# Altium PCB PCB3.PcbDoc
Units mm, origin at the board's own origin, x right, y up, seen from the top; angles counter-clockwise.
Board outline 200 x 100 mm, 2 copper layers (Top Layer, Bottom Layer); 133 components, 113 nets, 472 pads, 55 vias.
Unrouted connection lines stored in the file: 51.
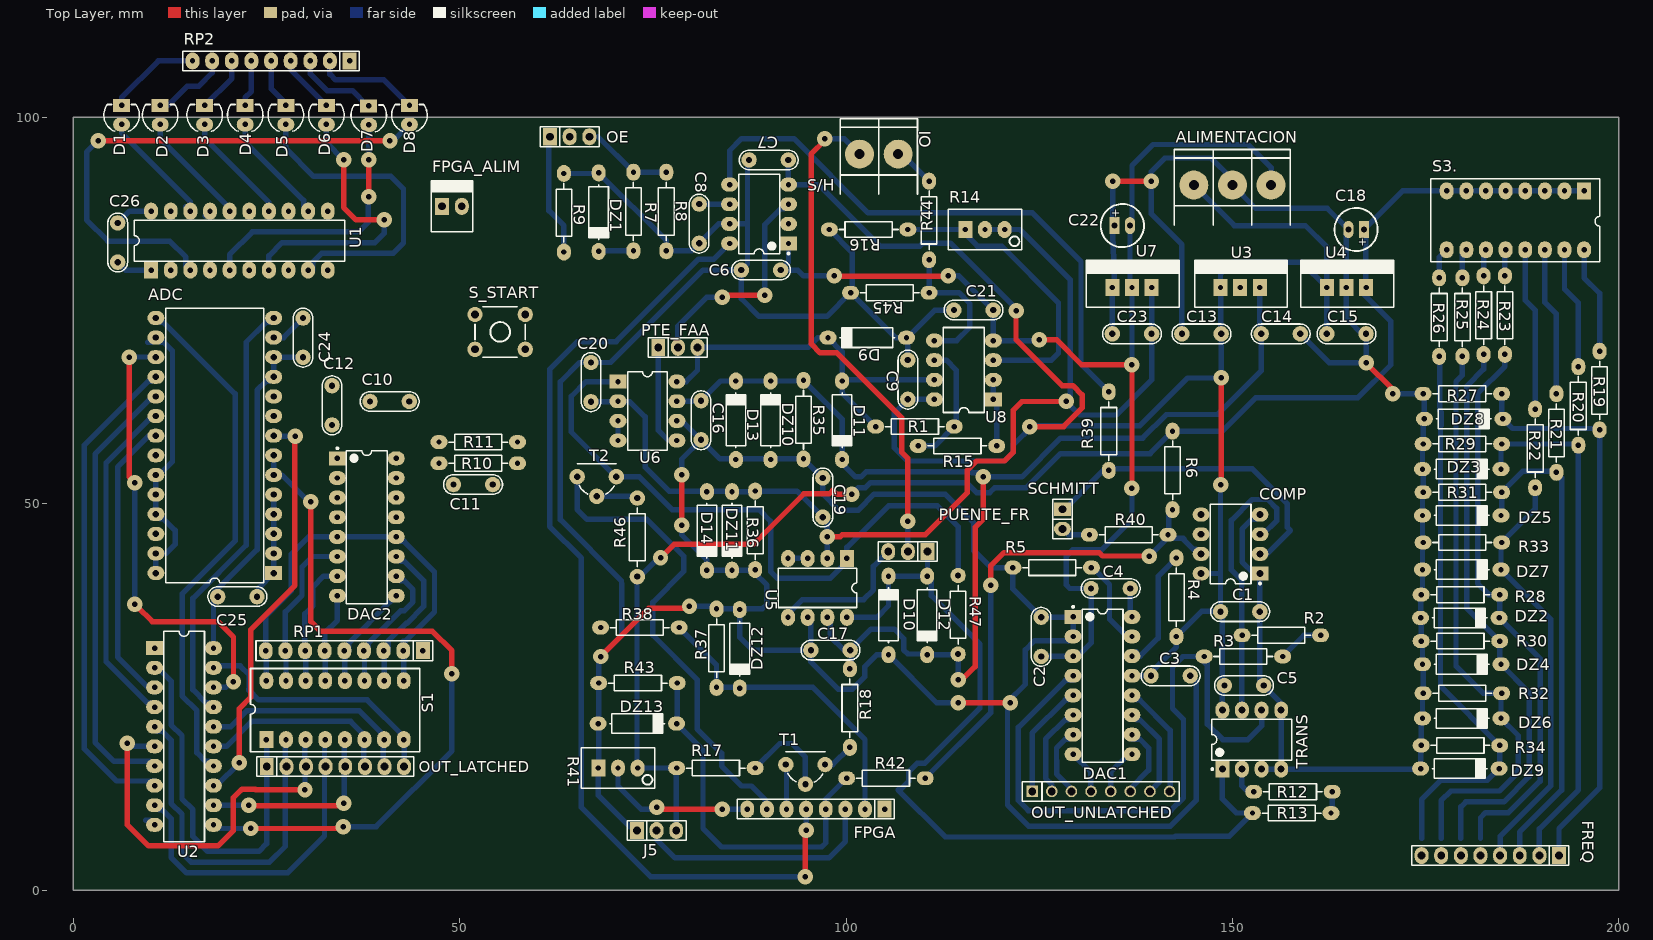
[diagram p0: Top Layer view]
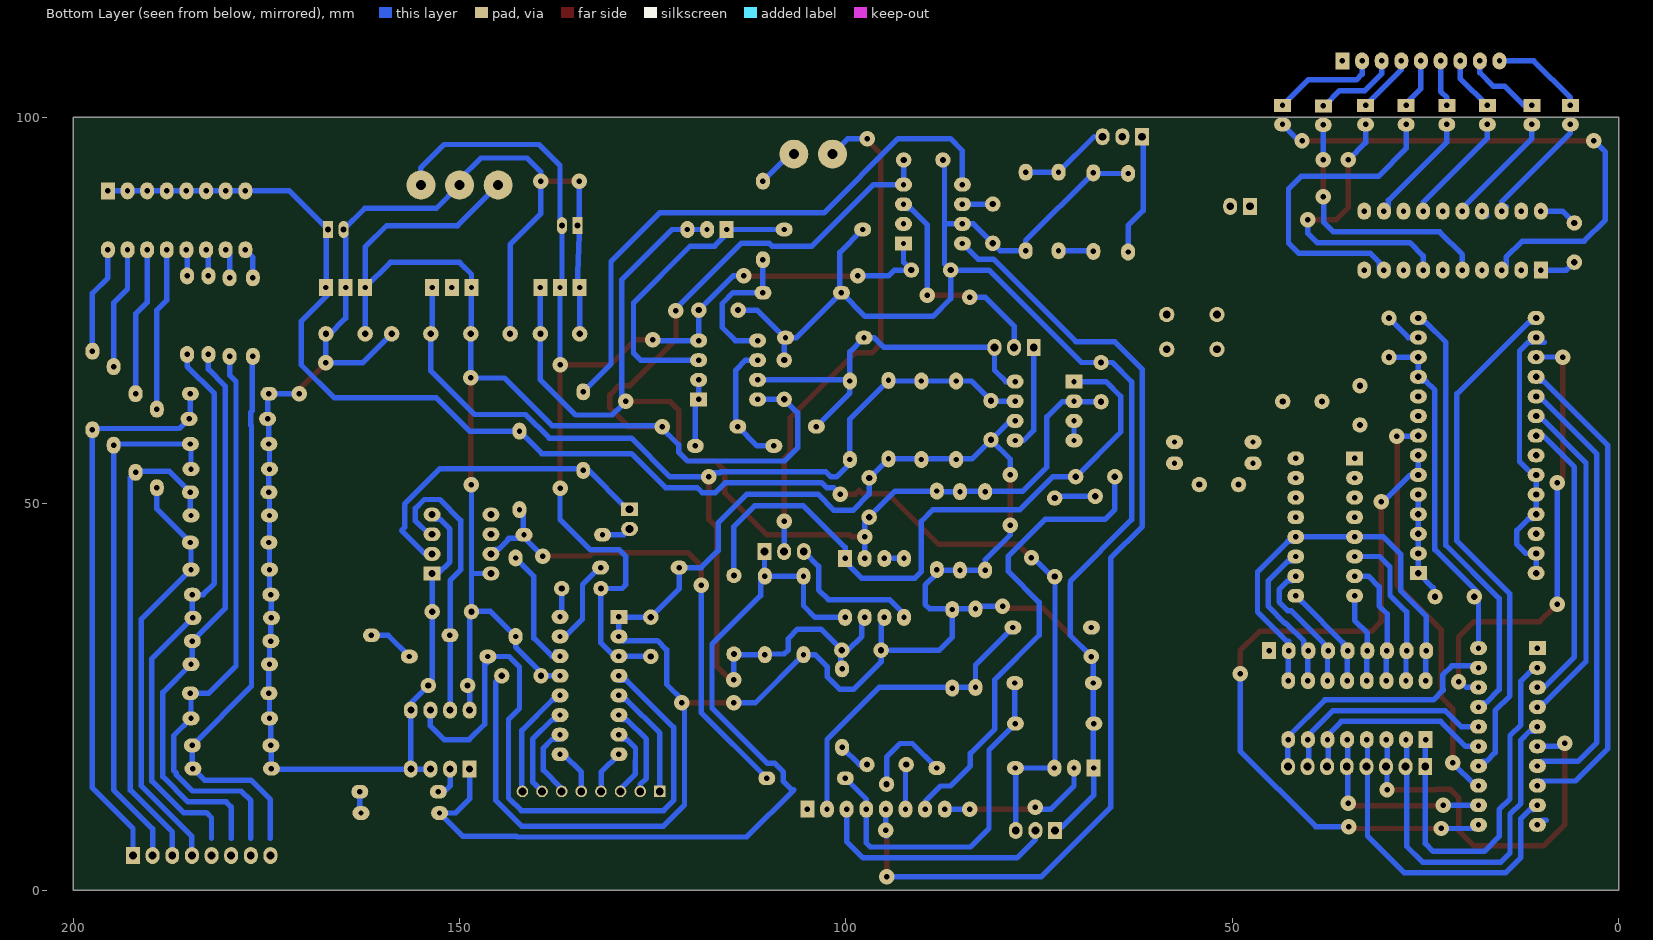
[diagram p1: Bottom Layer view, seen from below]

## Layer stack, top to bottom
Top Solder: solder mask 0.0102, Solder Resist, Dk 3.5
Top Layer: signal copper 0.0356
Dielectric 1: dielectric 0.32, FR-4, Dk 4.8
Bottom Layer: signal copper 0.0356
Bottom Solder: solder mask 0.0102, Solder Resist, Dk 3.5

## Board outline
0,0 0,100 200,100 200,0 0,0

## Design rules (kind name [scope] priority, off if disabled: settings)
Clearance [All] p1: gap=0.7
PolygonConnect [All] p1: connectstyle=Relief reliefconductorwidth=0.254 reliefentries=4 polygonreliefangle="90 Angle" airgapwidth=0.254
RoutingVias [All] p1: holewidth=0.7 width=2 viastyle="Through Hole" minholewidth=0.7 minwidth=2 maxholewidth=0.7 maxwidth=2
SolderMaskExpansion [All] p1: expansion=0.102
Width [All] p1: maxlimit=0.7 minlimit=0.7 preferedwidth=0.7
30 further rules are at their usual default settings.

## Components (designator, comment, footprint, x,y, rotation, side; value= is the part's Value field where it differs from the comment)
ADC "ADC0808CCN" DIP28 25.95,41.04 r180 top
ALIMENTACION "BORNERA 3" BORNERA3 150,91.25 r270 top
C1 "100n" CAP200 151,36.05 r0 top
C2 "100n" CAP200 125.25,32.8 r270 top
C3 "100n" CAP200 142,27.75 r180 top
C4 "10n" CAP200 134.25,39.05 r0 top
C5 "100n" CAP200 151.5,26.5 r0 top
C6 "100n" CAP200 89,80.25 r180 top
C7 "100n" CAP200 90,94.5 r180 top
C8 "10n" CAP200 81,86.25 r270 top
C9 "CAP" CAP200 108,66.07 r90 top
C10 "10n" CAP200 40.96,63.25 r180 top
C11 "100n" CAP200 51.75,52.5 r180 top
C12 "100n" CAP200 33.5,62.75 r270 top
C13 "330n" CAP200 146,72 r180 top
C14 "100n" CAP200 156.25,72 r0 top
C15 "100n" CAP200 164.75,72 r0 top
C16 "100n" CAP200 81.25,60.82 r270 top
C17 "100n" CAP200 98,31.07 r0 top
C18 "10u" CAP100RP 166,85.5 r180 top
C19 "100n" CAP200 97,50.82 r90 top
C20 "100n" CAP200 67,65.75 r90 top
C21 "CAP" CAP200 116.5,75.07 r180 top
C22 "2.2u" CAP100RP 135.75,86 r0 top
C23 "1u" CAP200 137,72 r180 top
C24 "100n" CAP200 29.75,71.5 r90 top
C25 "CAP" CAP200 21.25,38 r180 top
C26 "CAP" CAP200 5.77,83.81 r270 top
COMP "LM311N" N08E#1 149.75,44.8 r180 top
D1 "LED" LED3 6.27,100.31 r90 top
D2 "LED" LED3 11.27,100.31 r90 top
D3 "LED" LED3 17.02,100.31 r90 top
D4 "LED" LED3 22.27,100.31 r90 top
D5 "LED" LED3 27.52,100.31 r90 top
D6 "LED" LED3 32.77,100.31 r90 top
D7 "LED" LED3 38.25,100.25 r90 top
D8 "LED" LED3 43.52,100.31 r90 top
D9 "DIODO" DO41 102.75,71.5 r180 top
D10 "DIODO" DO41 105.5,35.57 r90 top
D11 "DIODO" DO41 99.5,60.82 r270 top
D12 "DIODO" DO41 110.5,35.57 r270 top
D13 "DIODO" DO41 85.75,60.82 r90 top
D14 "DIODO" DO41 82,46.5 r270 top
DAC1 "DAC0800LCN" N16E 133.19,26.49 r0 top
DAC2 "DAC0800LCN" N16E 38,47 r0 top
DZ1 "3.3V" DO41 68,87.75 r270 top
DZ2 "3.6V" DO41 179.42,35.25 r0 top
DZ3 "3.6V" DO41 179.67,54.5 r0 top
DZ4 "3.6V" DO41 179.67,29.25 r0 top
DZ5 "3.6V" DO41 179.67,48.5 r0 top
DZ6 "3.6V" DO41 179.67,22.25 r0 top
DZ7 "3.6V" DO41 179.67,41.5 r0 top
DZ8 "3.6V" DO41 179.92,61 r0 top
DZ9 "3.6V" DO41 179.42,15.75 r0 top
DZ10 "5.6V" DO41 90.25,60.82 r90 top
DZ11 "5.6V" DO41 85.25,46.5 r270 top
DZ12 "3.6V" DO41 86.25,31.25 r270 top
DZ13 "3.6V" DO41 73,21.57 r0 top
FPGA "CON8" SIP8#1 105,10.5 r180 top
FPGA_ALIM "MOLEX2" MOLEX2 47.75,88.5 r0 top
FREQ "CON8" SIP8#2 192.25,4.5 r180 top
IO "BORNERA 2" BORNERA2 104.25,95.25 r270 top
J5 "SAR/MOD" JUMPER3 75.5,7.75 r0 top
OE "JUMPER" JUMPER3 64.25,97.5 r0 top
OUT_LATCHED "CON8" SIP8#2 25.05,16 r0 top
OUT_UNLATCHED "CON8" SIP8#3 124.09,12.8 r0 top
PTE_FAA "JUMPER" JUMPER3 78.25,70.25 r0 top (schematic designator PUENTE_FAA)
PUENTE_FR "JUMPER" JUMPER3 108,43.82 r180 top
R1 "4k7" RES400#1 114,60 r180 top
R2 "1K5" RES400#1 151.25,33 r0 top
R3 "1K" RES400#1 156.5,30.25 r180 top
R4 "5K" RES400#1 142.75,43 r270 top
R5 "5K" RES400#1 131.75,41.75 r180 top
R6 "1K" RES400#1 142.25,49.25 r90 top
R7 "560" RES400#1 72.5,82.75 r90 top
R8 "1K" RES400#1 76.75,82.75 r90 top
R9 "1K" RES400#1 63.5,92.75 r270 top
R10 "5K" RES400#1 57.5,55.25 r180 top
R11 "5K" RES400#1 57.5,58 r180 top
R12 "1K" RES400#1 152.75,12.75 r0 top
R13 "1k5" RES400#1 162.75,10 r180 top
R14 "10k" "PRESET V" 117.98,85.5 r0 top
R15 "4k7" RES400#1 119.5,57.5 r180 top
R16 "4k7" RES400#1 108,85.5 r180 top
R17 "2k2" RES400#1 88.25,15.82 r180 top
R18 "6k8" RES400#1 100.5,18.5 r90 top
R19 "10k" RES400#1 197.5,69.75 r270 top
R20 "10k" RES400#1 194.75,67.75 r270 top
R21 "10k" RES400#1 191.92,64.25 r270 top
R22 "10k" RES400#1 189.17,62.25 r270 top
R23 "10k" RES400#1 185.25,79.5 r270 top
R24 "10k" RES400#1 182.5,79.5 r270 top
R25 "10k" RES400#1 179.75,79.25 r270 top
R26 "10k" RES400#1 176.75,79.25 r270 top
R27 "22k" RES400#1 174.67,64.25 r0 top
R28 "22k" RES400#1 174.42,38.25 r0 top
R29 "22k" RES400#1 174.67,57.75 r0 top
R30 "22k" RES400#1 174.42,32.25 r0 top
R31 "22k" RES400#1 174.67,51.5 r0 top
R32 "22k" RES400#1 174.67,25.5 r0 top
R33 "22k" RES400#1 174.67,45 r0 top
R34 "22k" RES400#1 174.42,18.75 r0 top
R35 "10k" RES400#1 94.5,55.82 r90 top
R36 "10k" RES400#1 88.25,41.5 r90 top
R37 "20k" RES400#1 83.25,26.25 r90 top
R38 "10k" RES400#1 68.25,34 r0 top
R39 "TBD" RES400#1 134,64.5 r270 top
R40 "TBD" RES400#1 131.5,46 r0 top
R41 "PRESET" "PRESET V" 70.5,15.82 r0 top
R42 "10K" RES400#1 110.25,14.5 r180 top
R43 "20K" RES400#1 68,26.82 r0 top
R44 "4k7" RES400#1 110.75,91.75 r270 top
R45 "4k7" RES400#1 110.75,77.32 r180 top
R46 "2k2" RES400#2 73,50.75 r270 top
R47 "6k8" RES400#2 114.5,30.57 r90 top
RP1 "R-PACK 8+1" RESNET8+1 45.25,31 r180 top
RP2 "R-PACK 8+1" RESNET8+1 35.77,107.31 r180 top
S1 "SW-DIP8" DIP-16-KEY 25,19.5 r0 top
S3. "SW-DIP8" DIP-16-KEY 195.5,90.5 r180 top
S/H "LF398N" N08E#2 88.75,87.5 r180 top
S_START "TACT SWITCH" TACTSWITCH 55.25,72.25 r90 top
SCHMITT "JUMPER" JUMPER2 128,48.03 r270 top
T1 "TRANSISTOR NPN" TO92 94.75,15 r0 top
T2 "TRANSISTOR NPN" TO92 67.75,52.25 r0 top
TRANS "LM358N" N08E#1 152.5,19.5 r90 top (schematic designator TRANSIMPEDANCIA)
U1 "SN74LS244N" 738-03 21.52,84.06 r0 top
U2 "MC74HC374N" 738-03 14.35,19.9 r270 top
U3 "7805" "TO-220 V" 151,78 r0 top
U4 "MC33269" "TO-220 V" 164.75,78 r0 top
U5 "MAX297CPA" DIP8 100.12,42.94 r270 top
U6 "MAX297CPA" DIP8 70.5,65.82 r0 top
U7 "7905" "TO-220 V" 137,78 r0 top
U8 "TL082ACJG" 693-02 115.25,67.32 r90 top

## Footprints (in the part's own frame and the unit in brackets; to place one, negate y for a bottom-side part, rotate by r counter-clockwise, add the part's x,y. Pads: shape width x height; smd on the part's side, far side on the other; paste and mask are expansions set on the pad)
693-02 [mm] "DIP; 8 Leads; Row Spacing 7.62 mm; Pitch 2.54 mm"
  rect 1.8x2.2 hole 0.7: 1(-3.81,-3.81)
  oval 1.8x2.2 hole 0.7: 2(-1.27,-3.81) 3(1.27,-3.81) 4(3.81,-3.81) 5(3.81,3.81) 6(1.27,3.81) 7(-1.27,3.81) 8(-3.81,3.81)
  silkscreen extent -5.5,-2.65 5.5,2.65
738-03 [mm] "DIP; 20 Leads; Row Spacing 7.62 mm; Pitch 2.54 mm"
  rect 1.8x2.2 hole 0.7: 1(-11.43,-3.81)
  oval 1.8x2.2 hole 0.7: 2(-8.89,-3.81) 3(-6.35,-3.81) 4(-3.81,-3.81) 5(-1.27,-3.81) 6(1.27,-3.81) 7(3.81,-3.81) 8(6.35,-3.81) 9(8.89,-3.81) 10(11.43,-3.81) 11(11.43,3.81) 12(8.89,3.81) 13(6.35,3.81) 14(3.81,3.81) 15(1.27,3.81) 16(-1.27,3.81) 17(-3.81,3.81) 18(-6.35,3.81) 19(-8.89,3.81) 20(-11.43,3.81)
  silkscreen extent -13.6,-2.65 13.6,2.65
BORNERA2 [mm] "Bornera con Tornillos 5mm separación"
  round 3.75 hole 1.3: 1(0,2.5) 2(0,-2.5)
  silkscreen extent -4.6,-5 5.2,5, body extent -3.76,-4.89 3.94,5.61, height 10
BORNERA3 [mm] "Bornera con Tornillos 5mm separación"
  round 3.75 hole 1.3: 1(0,5) 2(0,0) 3(0,-5)
  silkscreen extent -4.6,-7.5 5.2,7.5, body extent -3.76,-7.39 3.94,8.11, height 10.05
CAP100RP [mm] "Body diameter 5mm"
  rect 1.3x2.2 hole 0.762: 1(-1,0)
  oval 1.3x2.2 hole 0.762: 2(1,0)
  silkscreen extent -2.79,-2.79 2.79,2.79, body extent -2.53,-2.51 2.53,2.54, height 11.53
CAP200 [mm]
  round 2 hole 0.813: 1(-2.54,0) 2(2.54,0)
  silkscreen extent -3.81,-1.27 3.81,1.27, body extent -2.79,-1.17 2.79,1.12, height 6.24
DIP8 [mm]
  rect 2.2x1.8 hole 0.7: 1(0,0)
  oval 2.2x1.8 hole 0.7: 2(0,-2.54) 3(0,-5.08) 4(0,-7.62) 5(7.62,-7.62) 6(7.62,-5.08) 7(7.62,-2.54) 8(7.62,0)
  silkscreen extent 1.27,-8.89 6.35,1.27, body extent -0.06,-9.21 7.7,1.59, height 4.5
DIP28 [mm]
  rect 2.2x1.8 hole 0.813: 1(0,0)
  oval 2.2x1.8 hole 0.813: 2(0,-2.54) 3(0,-5.08) 4(0,-7.62) 5(0,-10.16) 6(0,-12.7) 7(0,-15.24) 8(0,-17.78) 9(0,-20.32) 10(0,-22.86) 11(0,-25.4) 12(0,-27.94) 13(0,-30.48) 14(0,-33.02) 15(15.24,-33.02) 16(15.24,-30.48) 17(15.24,-27.94) 18(15.24,-25.4) 19(15.24,-22.86) 20(15.24,-20.32) 21(15.24,-17.78) 22(15.24,-15.24) 23(15.24,-12.7) 24(15.24,-10.16) 25(15.24,-7.62) 26(15.24,-5.08) 27(15.24,-2.54) 28(15.24,0)
  silkscreen extent 1.27,-34.29 13.97,1.27, body extent -0.19,-34.54 15.43,1.47, height 4.66
DIP-16-KEY [mm] "DIP; 16 Leads; Row Spacing 7.62 mm; Pitch 2.54 mm"
  rect 1.8x2.2 hole 0.7: 1(0,0)
  oval 1.8x2.2 hole 0.7: 2(2.54,0) 3(5.08,0) 4(7.62,0) 5(10.16,0) 6(12.7,0) 7(15.24,0) 8(17.78,0) 9(17.78,7.62) 10(15.24,7.62) 11(12.7,7.62) 12(10.16,7.62) 13(7.62,7.62) 14(5.08,7.62) 15(2.54,7.62) 16(0,7.62)
  silkscreen extent -2.05,-1.59 19.83,9.2
DO41 [mm]
  oval 2.2x1.8 hole 0.7: 1(-5.08,0) 2(5.08,0)
  silkscreen extent -3.56,-1.27 3.56,1.27, body extent -5.46,-1.19 5.46,1.37, height 2.03
JUMPER2 [mm]
  rect 1.8x2.2 hole 1.016: 1(-1.27,0)
  oval 1.8x2.2 hole 1.016: 2(1.27,0)
  silkscreen extent -2.54,-1.27 2.54,1.27, body extent -2.46,-1.27 2.54,1.27, height 9.5
JUMPER3 [mm]
  rect 1.8x2.2 hole 1.016: 1(-2.54,0)
  oval 1.8x2.2 hole 1.016: 2(0,0) 3(2.54,0)
  silkscreen extent -3.81,-1.27 3.81,1.27, body extent -3.81,-1.3 3.81,1.27, height 16.15
LED3 [mm]
  oval 1.8x2.2 hole 0.7: 1(-1.219,0)
  rect 1.7x2.2 hole 0.7: 2(1.245,0)
  silkscreen extent -2.13,-2.3 1.36,2.3, body extent -1.65,-1.63 1.65,1.66, height 0.49
MOLEX2 [mm]
  rect 1.8x2.2 hole 1.016: 1(0,0)
  oval 1.8x2.2 hole 1.016: 2(2.54,0)
  silkscreen extent -1.4,-3.3 3.94,3.3, body extent -1.27,-3.17 3.81,3.17, height 10.74
N08E#1 [mm] "DIP, 8-Leads, Row Spacing 7.62mm, Pitch 2.54mm, Body 9.91x6.35mm"
  rect 2.2x1.8 hole 0.9: 1(-3.81,3.81)
  oval 2.2x1.8 hole 0.9: 2(-3.81,1.27) 3(-3.81,-1.27) 4(-3.81,-3.81) 5(3.81,-3.81) 6(3.81,-1.27) 7(3.81,1.27) 8(3.81,3.81)
  silkscreen extent -3.94,-5.15 2.65,5.23, body extent -3.6,-5.15 3.6,5.15, height 5.34
N08E#2 [mm] "DIP, 8-Leads, Row Spacing 7.62mm, Pitch 2.54mm, Body 9.91x6.35mm"
  rect 2.2x1.8 hole 0.7: 1(-3.81,3.81)
  oval 2.2x1.8 hole 0.7: 2(-3.81,1.27) 3(-3.81,-1.27) 4(-3.81,-3.81) 5(3.81,-3.81) 6(3.81,-1.27) 7(3.81,1.27) 8(3.81,3.81)
  silkscreen extent -3.94,-5.15 2.65,5.23, body extent -3.6,-5.15 3.6,5.15, height 5.34
N16E [mm] "DIP, 16-Leads, Row Spacing 7.62mm, Pitch 2.54mm, Body 19.3x6.35mm"
  rect 2.2x1.8 hole 0.7: 1(-3.81,8.89)
  oval 2.2x1.8 hole 0.7: 2(-3.81,6.35) 3(-3.81,3.81) 4(-3.81,1.27) 5(-3.81,-1.27) 6(-3.81,-3.81) 7(-3.81,-6.35) 8(-3.81,-8.89) 9(3.81,-8.89) 10(3.81,-6.35) 11(3.81,-3.81) 12(3.81,-1.27) 13(3.81,1.27) 14(3.81,3.81) 15(3.81,6.35) 16(3.81,8.89)
  silkscreen extent -3.93,-9.9 2.65,10.31, body extent -3.3,-9.9 3.3,9.9, height 4.32
"PRESET V" [mm]
  rect 1.8x2.2 hole 0.7: 1(-2.54,0)
  oval 1.8x2.2 hole 0.7: 2(0,0) 3(2.54,0)
  silkscreen extent -4.76,-2.6 4.76,2.6, body extent -4.7,-2.42 4.83,2.42, height 11.55
RES400#1 [mm]
  oval 2.2x1.8 hole 0.7: 1(0,0) 2(10.16,0)
  silkscreen extent 1.27,-1.02 8.89,1.02, body extent -0.3,-1.14 10.46,1.17, height 2.43
RES400#2 [mm]
  round 2 hole 0.813: 1(0,0) 2(10.16,0)
  silkscreen extent 1.27,-1.02 8.89,1.02, body extent -0.3,-1.14 10.46,1.17, height 2.43
RESNET8+1 [mm]
  rect 1.8x2.2 hole 0.7: 1(0,0)
  oval 1.8x2.2 hole 0.7: 2(2.54,0) 3(5.08,0) 4(7.62,0) 5(10.16,0) 6(12.7,0) 7(15.24,0) 8(17.78,0) 9(20.32,0)
  silkscreen extent -1.27,-1.27 21.59,1.27, body extent -1.09,-0.64 21.41,0.62, height 5.3
SIP8#1 [mm]
  rect 1.8x2.2 hole 0.7: 1(0,0)
  oval 1.8x2.2 hole 0.7: 2(2.54,0) 3(5.08,0) 4(7.62,0) 5(10.16,0) 6(12.7,0) 7(15.24,0) 8(17.78,0)
  silkscreen extent -1.27,-1.27 19.05,1.27, body extent -1.27,-1.27 19.05,1.27, height 8.38
SIP8#2 [mm]
  rect 1.8x2.2 hole 1.016: 1(0,0)
  oval 1.8x2.2 hole 1.016: 2(2.54,0) 3(5.08,0) 4(7.62,0) 5(10.16,0) 6(12.7,0) 7(15.24,0) 8(17.78,0)
  silkscreen extent -1.27,-1.27 19.05,1.27, body extent -1.27,-1.27 19.05,1.27, height 8.38
SIP8#3 [mm]
  rect 1.5x1.5 hole 1.016: 1(0,0)
  round 1.5 hole 1.016: 2(2.54,0) 3(5.08,0) 4(7.62,0) 5(10.16,0) 6(12.7,0) 7(15.24,0) 8(17.78,0)
  silkscreen extent -1.27,-1.27 19.05,1.27, body extent -1.27,-1.27 19.05,1.27, height 8.38
TACTSWITCH [mm]
  round 2 hole 1.016: 1(-2.25,-3.25) 2(-2.25,3.25) 3(2.25,-3.25) 4(2.25,3.25)
  silkscreen extent -3.25,-3.25 3.25,3.25, body extent -3.05,-3.95 3.15,3.95, height 7
TO92 [mm]
  round 2 hole 0.813: 1(0,-1.27) 2(2.54,1.27) 3(-2.54,1.27)
  silkscreen extent -2.54,-1 2.54,2.92, body extent -2.79,-1.55 2.79,2.79, height 8
"TO-220 V" [mm]
  rect 1.8x2.2 hole 0.7: 1(-2.54,0) 2(0,0) 3(2.54,0)
  silkscreen extent -5.9,-2.54 6.1,3.54, body extent -5,-2 5,3, height 18

## Part data
ADC: "28 pin 8-bit Microprocessor Compatible A/D Converters With 8-Channel Multiplexer 13 per tube"
C1 C2 C3 C4 C5 C6 C7 C8 C10 C11 C12 C13 C14 C15 C16 C17 C19 C20 C23 C24: library part CAP
C18 C22: library part CAPPOL
COMP: "Voltage Comparator, 8-pin MDIP"
DAC1 DAC2: "8-Bit D/A Converter, 16-pin MDIP"
DZ1 DZ2 DZ3 DZ4 DZ5 DZ6 DZ7 DZ8 DZ9 DZ10 DZ11 DZ12 DZ13: library part "DIODO ZENER"
J5 OE PTE_FAA PUENTE_FR: library part JUMPER3
R1 R2 R3 R4 R5 R6 R7 R8 R9 R10 R11 R12 R13 R15 R16 R17 R18 R19 R20 R21 R22 R23 R24 R25 R26 R27 R28 R29 R30 R31 R32 R33 R34 R35 R36 R37 R38 R39 R40 R42 R43 R44 R45 R46 R47: library part RES
R14: library part PRESET
S1 S3.: "4009 Series DIP Switch, Raised actuator"
S/H: "Monolithic Sample and Hold Circuits, 8-pin MDIP"
TRANS: "Low Power Dual Operational Amplifier, 8-pin MDIP"
U1: "Octal Buffer/Line Driver with 3-State Outputs"
U2: "Octal 3-State Non-Inverting D-Type Flip-Flop"
U3 U4: library part 78XX, "REGULDOR POSITIVO"
U5 U6: "Active Filter Single SW-CAP Low Pass 8th Order 50kHz 8-Pin PDIP N"
U7: library part 79XX, "REGULADOR NEGATIVO"
U8: "JFET-Input Operational Amplifier"

## Via types
v1: diameter 2, hole 0.711, Top Layer to Bottom Layer, 55 vias

## Nets (pads, with @x,y where several pads share a name; then routed paths per layer and width w, separated by ;. In a path a pad name is that pad's centre, name@x,y a point inside that pad or via, vN(x,y) a via of type N, cw(c..) or ccw(c..) an arc to the next point about the centre after c; other vN are vias at no path point)
B0: DAC2.5 DAC2.12 RP1.2 RP1.9 S1.9 S1.16 U1.2 U1.17 | length 57
  Bottom Layer w0.7: U1.17@17.12,87.28 U1.17 ; RP1.9@24.91,30.37 RP1.9@24.91,31 ; S1.16 25,30.93 RP1.9 24.93,35.47 28.21,38.75 28.21,43.46 30.48,45.73 DAC2.5 DAC2.12 42.4,45.14 42.818,45.14 46.76,41.198 46.76,36.01 42.96,32.21 42.71,32.21 RP1.2 ; RP1.2@42.69,30.37 RP1.2@42.69,31 ; S1.9 RP1.2@42.78,30.93
B1: DAC2.11 RP1.3 S1.10 U1.15 | length 20.9
  Bottom Layer w0.7: RP1.3@40.15,30.37 RP1.3@40.15,31 ; RP1.3 40.76,31 40.76,32.24 43.07,34.55 43.188,34.55 45.36,36.722 45.36,40.058 42.818,42.6 42.4,42.6 DAC2.11 ; S1.10 RP1.3@40.24,30.93
B2: DAC2.10 RP1.4 S1.11 U1.13 | length 18.8
  Bottom Layer w0.7: RP1.4@37.61,30.37 RP1.4@37.61,31 ; RP1.4 38.22,31 38.22,32.008 42.372,36.16 42.818,36.16 43.96,37.302 43.96,38.918 42.818,40.06 42.35,40.06 42.35,40.65 DAC2.10 ; S1.11 RP1.4@37.7,30.93
B3: DAC2.9 RP1.5 S1.12 U1.11 | length 13.6
  Bottom Layer w0.7: RP1.5@35.07,30.37 RP1.5@35.07,31 ; RP1.5 35.68,31 35.68,32.008 41.022,37.35 ; S1.12 RP1.5@35.16,30.93
B4: DAC2.8 RP1.6 S1.13 U1.8 | length 12.2
  Bottom Layer w0.7: RP1.6@32.53,30.37 RP1.6@32.53,31 ; RP1.6 32.55,33.27 34.19,34.91 DAC2.8 ; S1.13 RP1.6@32.62,30.93
B5: DAC2.7 RP1.7 S1.14 U1.6 | length 17
  Bottom Layer w0.7: 29.97,35 29.97,35.76 31.01,36.8 31.01,39.26 32.4,40.65 DAC2.7 ; RP1.7@29.99,30.37 29.99,35 ; RP1.7 30.08,30.93 S1.14
B6: DAC2.6 RP1.8 S1.15 U1.4 | length 26.2
  Bottom Layer w0.7: 27.43,35 27.43,35.72 27.47,35.76 ; RP1.8@27.45,30.37 27.45,35 ; S1.15 27.54,30.93 RP1.8 27.47,35.76 ; DAC2.6 30.94,43.19 29.61,41.86 29.61,38.17 27.47,36.03 27.47,35.76
CLK_9FS: FPGA.6 T1.3 | length 5.6
  Bottom Layer w0.7: FPGA.6@92.3,10.25 T1.3@92.3,15.89
CLK_DAC: ADC.10 R18.1 T1.2 | length 4.1
  Bottom Layer w0.7: T1.2 98.27,16.27 R18.1
CLK_FILTRO: FPGA.7 T2.3 | length 62
  Bottom Layer w0.7: T2.3 65.21,49.29 66.5,48 74.25,48 79,43.25 79,41.25 75,37.25 75,33 80.75,27.25 80.75,20.88 83.9,17.73 83.9,16.1 86.5,13.5 87.75,13.5 89.76,11.49 FPGA.7@89.76,10.25
FPGA_OE: DZ1.2 R7.1 R38.1 | length 4.4
  Bottom Layer w0.7: DZ1.2@68.08,82.75 R7.1
FR_IN: D10.2 D12.1 PUENTE_FR.1 R13.2 TRANS.1 U5.8 | length 111.8
  Bottom Layer w0.7: U5.8 104,35.32 105.5,36.82 D10.2 D12.1 ; PUENTE_FR.1 110.54,40.69 D12.1 ; TRANS.1 148.69,11.81 150.5,10 R13.2 149.59,7 142.66,7 142.56,6.9 112.85,6.9 106.75,13 107,13 108.1,14.1 108.1,15.308 109.242,16.45 110.22,16.45 117.341,23.571 117.341,31.841 111.05,38.132 111.05,40.1 D12.1
GND: ADC.1 ADC.2 ADC.3 ADC.4 ADC.5 ADC.13 ADC.16 ADC.23 ADC.24 ADC.25 ADC.27 ADC.28 ALIMENTACION.2 C1.2 C2.1 C3.1 C5.2 C6.2 C7.2 C8.2 C9.2 C11.1 C12.1 C13.2 C14.2 C15.2 C16.2 C17.1 C18.2 C19.2 C20.2 C21.2 C22.1 C23.2 C24.2 C25.1 C26.2 COMP.1 COMP.4 D9.1 D10.1 D13.1 D14.2 DAC1.1 DAC1.2 DAC2.1 DAC2.2 DZ1.1 DZ2.1 DZ3.1 DZ4.1 DZ5.1 DZ6.1 DZ7.1 DZ8.1 DZ9.1 DZ10.1 DZ11.2 DZ12.1 DZ13.1 FPGA_ALIM.2 J5.1 R5.2 R8.1 R9.1 R11.1 R16.2 R27.1 R28.1 R29.1 R30.1 R31.1 R32.1 R33.1 R34.1 R35.1 R36.1 R37.2 R41.1 R43.1 R45.2 RP1.1 RP2.1 S/H.7 TRANS.3 TRANS.4 TRANS.5 U1.1 U1.10 U1.19 U2.10 U3.2 U4.2 U5.6 U6.6 U7.1 | length 724.9
  Top Layer w0.7: v1(68.25,30.25) 74.5,36.5 v1@80,36.5 ; v1(78.75,47.25) v1(78.75,53.75) ; v1(121.25,24.25) v1(114.5,24.25) ; v1(134.5,91.75) v1(139.5,91.75) ; v1(167.29,68.25) 170.75,64.79 v1(170.75,64.25) ; v1(114.5,24.25) 114.875,24.625 v1(114.5,24.25)
  Bottom Layer w0.7: C26.2 6.79,80.25 U1.1 10.65,80.25 U1.1@10.68,80.28 ; 9.4,9.06 9.95,9.06 U2.10 U2.10@10.75,8.26 ; 9.64,70.93 10.12,70.93 ADC.16 11.3,70.93 11.718,70.93 12.86,69.788 12.86,55.472 11.128,53.74 ADC.23 ADC.24 ADC.25 11.3,48.07 11.718,48.07 13.21,46.578 13.21,44.75 12.04,43.58 ADC.27 ADC.28 ; C25.1@24.04,38 24.04,39.13 ADC.1 ADC.2 ADC.3 ADC.4 ADC.5 ; ADC.13@25.95,70.97 ADC.13 27.23,71.52 C24.2 ; R9.1 DZ1.1@67.92,92.75 ; R41.1 67.96,12.29 72,8.25 J5.1@72.96,8.25 ; R41.1@68,15.86 R43.1 68,30 v1(68.25,30.25) 71,33 71,39.691 70.95,39.741 70.95,40.05 63.05,47.95 63.05,65.8 65.54,68.29 C20.2 69.54,68.29 81.5,80.25 C6.2 ; DZ1.1 76.75,84.08 R8.1 80.04,82.75 C8.2 83.52,86.23 S/H.7 87.02,86.23 87.25,86 ; U6.6@78,60.74 U6.6 78.79,60.74 C16.2 ; v1(78.75,47.25) 78.75,46 82,42.75 D14.2 DZ11.2 88.17,41.42 88.17,41.08 89.75,39.5 89.75,37 89.16,36.41 R37.2 82.91,36.75 v1(79.75,36.75) ; v1(78.75,53.75) 78.75,55.78 C16.2 ; DZ12.1 86.25,32.75 87.93,31.07 C17.1 ; C7.2@87.25,94.29 87.25,86 ; U5.6 95.46,34.9 C17.1 ; R16.2 100.8,82.54 100.8,77.53 R45.2 ; C9.2 D9.1@108,71.57 ; C21.2 111.5,75.07 D9.1@108,71.57 ; v1(114.5,24.25) 111.74,24.25 D10.1 103.99,30.49 102.45,28.95 102.45,27.652 100.798,26 99,26 95.46,29.54 C17.1 ; v1@120.89,24.41 120.89,11.035 123.625,8.3 141.98,8.3 145.34,11.66 145.34,26.95 C3.1 ; v1@120.92,24.38 123.2,26.66 123.2,31.109 124.401,32.31 128.79,32.31 128.79,32.25 DAC1.2 DAC1.1 129.34,35.34 C2.1 121.59,39 R5.2 118.75,41.75 116.55,43.95 116.55,47.52 112.82,51.25 103.649,51.25 101.599,49.2 99.05,49.2 97,51.25 C19.2 96.96,53.36 R35.1 83.71,55.82 C16.2 ; C23.2 U7.1 ; v1@134.5,91.5 134.5,84.75 U7.1@134.75,78.29 ; C13.2 143.46,83.54 139.5,87.5 v1(139.5,91.75) 139.5,93 141.25,94.75 147.25,94.75 150,92 ALIMENTACION.2 153,88.25 162.25,88.25 C18.2 ; COMP.4 152.97,48.02 152.552,48.02 151.26,46.728 151.26,42.49 152.76,40.99 COMP.1 153.54,40.97 C1.2 153.54,27 C5.2 156.31,24.23 TRANS.5 TRANS.4 ; TRANS.3 TRANS.4 ; C14.2 162.54,68.25 v1(167.29,68.25) C15.2 ; C18.2@165.25,85.5 164.75,85 U4.2 164.75,74.04 C15.2@167.04,71.75 ; v1(170.75,64.25) R27.1 R27.1@174.67,64.62 ; R28.1 174.34,38.17 DZ2.1 174.42,35.17 R30.1 174.59,32.08 DZ4.1 174.67,29.17 R32.1 174.59,25.42 DZ6.1 174.42,22.08 R34.1 174.34,18.67 DZ9.1 174.28,15.69 TRANS.4 ; R28.1@174.59,38.42 DZ7.1@174.59,42 ; R33.1@174.67,45.5 R33.1@174.59,45.42 ; R27.1@174.84,64.08 DZ8.1 174.67,60.83 R29.1 174.59,57.67 DZ3.1 174.67,54.42 R31.1 174.59,51.42 DZ5.1 R33.1@174.59,45.42 ; DZ7.1@174.88,41.71 DZ7.1@174.59,42 ; C6.2 87.25,81.04 87.25,86 ; C6.2 86.46,76.54 88.75,74.25 97.52,74.25 R45.2 ; R45.2 106.41,71.5 D9.1 107.93,71.5 D9.1@108,71.57 ; DZ7.1@174.59,42 R33.1@174.59,45.42
LATCH_OE: OE.3 R7.2 R8.2 U2.1 | length 11.9
  Bottom Layer w0.7: OE.3 67.91,97.5 R7.2 R8.2
NetADC_8: ADC.8 U2.13 | length 53
  Top Layer w0.7: v1(21.5,16.5) 21.5,23.5 22.98,24.98 22.98,32.028 23,32.048 23,33.75 28.7,39.45 28.7,58.45 v1@28.75,58.5
  Bottom Layer w0.7: U2.13 18.578,13.55 21.5,16.472 v1(21.5,16.5) ; ADC.8@25.95,59.41 ADC.8 26.02,58.75 v1(28.75,58.75)
NetADC_14: ADC.14 U2.17 | length 56.6
  Bottom Layer w0.7: U2.17 17.57,24.3 17.152,24.3 15.5,25.952 15.5,37.77 22.4,44.67 22.4,70.928 24.942,73.47 25.95,73.47 ADC.14
NetADC_15: ADC.15 U2.14 | length 67.2
  Bottom Layer w0.7: ADC.15 11.3,73.47 11.718,73.47 20.96,64.228 20.96,45.21 14.1,38.35 14.1,25.16 16.01,23.25 16.01,17.822 17.152,16.68 17.57,16.68 U2.14
NetADC_17: ADC.17 U2.18 | length 58.7
  Top Layer w0.7: v1(7.25,69) 7.25,53.5 v1(8,52.75) ; v1@8.25,36.75 10.25,34.75 18.75,34.75 20.75,32.75 v1(20.75,27)
  Bottom Layer w0.7: v1(7.25,69) ADC.17@10.69,69 ; v1(8,37) v1(8,52.75) ; U2.18 19.75,26.25 v1@20.75,27.25
NetADC_18: ADC.18 U2.8 | length 63.6
  Bottom Layer w0.7: U2.8 10.54,14.14 5.61,14.14 1.45,18.3 1.45,57.598 9.702,65.85 10.12,65.85 ADC.18
NetADC_19: ADC.19 U2.7 | length 57.2
  Bottom Layer w0.7: U2.7 9.95,16.68 5.32,16.68 2.85,19.15 2.85,56.458 10.292,63.9 ADC.19
NetADC_20: ADC.20 U2.4 | length 45.7
  Bottom Layer w0.7: U2.4@9.92,24.3 U2.4@9.96,24.26 ; U2.4 10.51,23.71 U2.4@10.46,23.76 ; ADC.20 10.292,61.36 4.25,55.318 4.25,29.582 10.46,23.372 U2.4@10.46,23.76 ; U2.4@9.96,24.26 U2.4@10.46,23.76 ; U2.4@9.96,24.26 10.46,24.26 U2.4@10.46,23.76
NetADC_21: ADC.21 U2.3 | length 38.2
  Bottom Layer w0.7: U2.3@10.54,25.66 U2.3 9.71,26.25 5.75,30.21 5.75,54.75 9.82,58.82 ADC.21
NetC4_2: C4.2 DAC1.16 | length 3.8
  Bottom Layer w0.7: C4.2 136.79,35.59 DAC1.16
NetC8_1: C8.1 S/H.6 | length 3.9
  Bottom Layer w0.7: C8.1 81.02,88.77 S/H.6
NetC10_1: C10.1 DAC2.16
NetCOMP_2: COMP.2 R39.2 SCHMITT.1 | length 42
  Bottom Layer w0.7: SCHMITT.1 128.25,49.3 133.5,54.55 152.558,54.55 157.11,49.998 157.11,46.94 157.5,46.55 154.48,43.53 COMP.2 COMP.2@153.58,43.55
NetCOMP_3: COMP.3 R2.1 TRANS.7 | length 37
  Bottom Layer w0.7: TRANS.7 151.23,40.09 149.86,41.46 149.86,47.868 152.552,50.56 154.568,50.56 155.71,49.418 155.71,47.802 153.978,46.07 COMP.3
NetD1_1: D1.1 U1.18 | length 15.7
  Bottom Layer w0.7: D1.1 6.27,97.98 15.17,89.08 U1.18 U1.18@14.58,88.46
NetD1_2: D1.2 RP2.9 | length 12.2
  Bottom Layer w0.7: D1.2 6.27,102.56 11.02,107.31 RP2.9
NetD2_1: D2.1 U1.16 | length 14.9
  Bottom Layer w0.7: D2.1 11.27,97.268 20.25,88.288 U1.16
NetD2_2: D2.2 RP2.8 | length 10
  Bottom Layer w0.7: D2.2 12.265,101.555 14.77,104.06 16.27,104.06 17.99,105.78 RP2.8
NetD3_1: D3.1 U1.14 | length 14.7
  Bottom Layer w0.7: D3.1 17.02,97.31 25.33,89 U1.14
NetD3_2: D3.2 RP2.7 | length 7.2
  Bottom Layer w0.7: D3.2 20.53,105.065 RP2.7
NetD4_1: D4.1 U1.12 | length 15.4
  Bottom Layer w0.7: D4.1 22.27,96.81 29.82,89.26 29.82,88.46 U1.12 U1.12@30.41,88.67
NetD4_2: D4.2 RP2.6 | length 6.1
  Bottom Layer w0.7: D4.2 22.27,102.56 23.07,103.36 RP2.6
NetD5_1: D5.1 U1.9 | length 42.3
  Bottom Layer w0.7: D5.1 27.52,95.98 31.125,92.375 41.125,92.375 42.75,90.75 42.75,83.75 41.4,82.4 32.142,82.4 31,81.258 31,80.25 U1.9 U1.9@30.41,79.82
NetD5_2: D5.2 RP2.5 | length 6.5
  Bottom Layer w0.7: RP2.5 25.61,103.72 27.52,101.81 D5.2
NetD6_1: D6.1 U1.7 | length 37.3
  Top Layer w0.7: v1(35,94.5) 35,88.351 36.601,86.75 v1(40.25,86.75)
  Bottom Layer w0.7: U1.7 25.33,82.08 27.05,83.8 39.05,83.8 40.25,85 v1(40.25,86.75) ; D6.1 32.77,96.73 v1(35,94.5)
NetD6_2: D6.2 RP2.4 | length 7.7
  Bottom Layer w0.7: RP2.4 28.15,106.175 D6.2
NetD7_1: D7.1 U1.5 | length 34.6
  Top Layer w0.7: v1(38.25,89.75) v1(38.25,94.5)
  Bottom Layer w0.7: U1.5@20.25,80 U1.5 20.25,82.25 23.2,85.2 36.95,85.2 38.2,86.45 38.2,89.7 v1(38.25,89.75) ; D7.1@38.02,99.031 D7.1@38.02,99.091 ; v1(38.25,94.5) D7.1
NetD7_2: D7.2 RP2.3 | length 10.7
  Bottom Layer w0.7: RP2.3 30.69,105.615 32.85,103.455 36.12,103.455 D7.2@38.02,101.555
NetD8_1: D8.1 U1.3 | length 69.1
  Top Layer w0.7: v1(3.25,97) v1(41,97)
  Bottom Layer w0.7: v1@3.5,97.25 v1(3.25,97) 1.75,95.5 1.75,86.75 4.5,84 12.5,84 14.58,81.92 14.58,80.84 U1.3 ; v1(41,97) 41.429,97 D8.1
NetD8_2: D8.2 RP2.2 | length 13.7
  Bottom Layer w0.7: RP2.2 33.23,105.6 33.975,104.855 40.22,104.855 D8.2
NetD9_2: D9.2 D11.1 PTE_FAA.3 R1.2 U6.8 U8.7 | length 49.7
  Bottom Layer w0.7: U6.8 79.32,65.82 80.79,67.29 PTE_FAA.3 95.1,70.25 96.35,71.5 D9.2 99.5,69.67 D11.1 ; R1.2 99.5,64.34 D11.1 ; U8.7 99.65,66.05 D11.1
NetDAC1_4: DAC1.4 R3.2 TRANS.6 | length 83.8
  Bottom Layer w0.7: DAC1.4 129.38,27.17 128.372,27.17 122.29,21.088 122.29,11.615 123.605,10.3 142,10.3 143.67,11.97 143.67,22.13 142.25,23.55 142.25,28.91 143.59,30.25 145.59,30.25 146.74,29.1 ; R3.2 146.34,29.91 146.74,29.51 146.74,29.1 ; TRANS.6@153.77,22.27 153.77,21.27 152,19.5 148.75,19.5 146.74,21.51 146.74,29.1
NetDAC1_5: DAC1.5 OUT_UNLATCHED.1 | length 14.9
  Bottom Layer w0.7: OUT_UNLATCHED.1 124.09,20.348 128.372,24.63 128.79,24.63 DAC1.5
NetDAC1_6: DAC1.6 OUT_UNLATCHED.2 | length 11.9
  Bottom Layer w0.7: OUT_UNLATCHED.2 126.63,13.69 125.83,14.49 125.83,19.548 128.372,22.09 128.79,22.09 DAC1.6
NetDAC1_7: DAC1.7 OUT_UNLATCHED.3 | length 9.3
  Bottom Layer w0.7: OUT_UNLATCHED.3 129.17,13.13 127.25,15.05 127.25,16.752 127.23,16.772 127.23,18.408 128.372,19.55 128.79,19.55 DAC1.7
NetDAC1_8: DAC1.8 OUT_UNLATCHED.4 | length 5.8
  Bottom Layer w0.7: DAC1.8 131.68,15.3 131.68,12.83 OUT_UNLATCHED.4
NetDAC1_9: DAC1.9 OUT_UNLATCHED.5 | length 6.2
  Bottom Layer w0.7: OUT_UNLATCHED.5 134.25,15.3 136.55,17.6 DAC1.9
NetDAC1_10: DAC1.10 OUT_UNLATCHED.6 | length 9.8
  Bottom Layer w0.7: OUT_UNLATCHED.6 136.79,13.19 139.15,15.55 139.15,18.408 138.008,19.55 137,19.55 DAC1.10
NetDAC1_11: DAC1.11 OUT_UNLATCHED.7 | length 12.1
  Bottom Layer w0.7: DAC1.11 137.59,22.09 138.008,22.09 140.55,19.548 140.55,14.026 140.07,13.546 140.07,13.54 OUT_UNLATCHED.7
NetDAC1_12: DAC1.12 OUT_UNLATCHED.8 | length 14.7
  Bottom Layer w0.7: DAC1.12 137.59,24.63 138.008,24.63 141.95,20.688 141.95,12.88 OUT_UNLATCHED.8
NetDAC1_14: DAC1.14 R4.1 | length 16.5
  Bottom Layer w0.7: DAC1.14@137.59,30.89 DAC1.14 138.05,30.3 140.375,32.625 140.375,40.625 R4.1
NetDAC1_15: DAC1.15 R5.1 | length 11.6
  Bottom Layer w0.7: R5.1 131.909,41.75 134.09,39.569 134.09,35.09 136.34,32.84 DAC1.15
NetDAC2_4: DAC2.4 R12.1 TRANS.2 | length 4
  Bottom Layer w0.7: TRANS.2 151.23,13.52 152,12.75 R12.1
NetDAC2_14: DAC2.14 R10.2
NetDAC2_15: DAC2.15 R11.2
NetDZ2_2: DZ2.2 FREQ.5 R23.2 R28.2 | length 73.1
  Bottom Layer w0.7: 182.09,6.75 182.09,9.39 182.75,10.05 185.718,10.05 189.8,14.132 189.8,29.988 184.538,35.25 DZ2.2 ; DZ2.2@184.58,35.33 R28.2 183.17,38.25 181.72,39.7 181.72,64.25 185.25,67.78 R23.2
NetDZ3_2: DZ3.2 FREQ.2 R20.2 R29.2 | length 68.3
  Bottom Layer w0.7: DZ3.2 184.75,57.67 R29.2@184.83,57.67 ; R29.2 R20.2@194.75,57.75 ; FREQ.2 189.71,7.96 194.75,13 R20.2
NetDZ4_2: DZ4.2 FREQ.6 R24.2 R30.2 | length 73.4
  Bottom Layer w0.7: 179.55,6.75 179.55,10.8 180.2,11.45 185.138,11.45 188.4,14.712 188.4,25.6 DZ4.2 184.58,29.42 R30.2 184.542,32.25 180.32,36.472 180.32,65.25 182.5,67.43 R24.2
NetDZ5_2: DZ5.2 FREQ.3 R21.2 R31.2 | length 63.3
  Bottom Layer w0.7: DZ5.2@184.83,48.58 R31.2 187.57,54.24 191.77,54.24 R21.2 192.6,53.41 192.6,12.973 187.17,7.543 FREQ.3
NetDZ6_2: DZ6.2 FREQ.7 R25.2 R32.2 | length 75.2
  Bottom Layer w0.7: 177.01,6.75 177.01,11.61 178.25,12.85 184.558,12.85 186.65,14.942 186.65,15.15 187,15.5 187,20 DZ6.2 R32.2@184.75,25.42 ; R25.2 179.75,66.66 178.92,65.83 178.92,29 182.42,25.5 R32.2
NetDZ7_2: DZ7.2 FREQ.4 R22.2 R33.2 | length 54.7
  Bottom Layer w0.7: FREQ.4 184.63,6.983 191.2,13.553 191.2,35.05 DZ7.2 R33.2@184.75,44.92 ; R33.2 189.17,49.34 R22.2
NetDZ8_2: DZ8.2 FREQ.1 R19.2 R27.2 | length 72.8
  Bottom Layer w0.7: R27.2 184.83,61.17 DZ8.2 186.25,59.75 R19.2@196.66,59.75 ; FREQ.1 192.25,8 197.5,13.25 R19.2
NetDZ9_2: DZ9.2 FREQ.8 R26.2 R34.2 | length 73.3
  Bottom Layer w0.7: 174.47,6.75 174.47,11.72 177,14.25 183,14.25 DZ9.2 ; R26.2 176.82,69.09 176.82,62.048 176.99,61.878 176.99,60.192 176.92,60.122 176.92,26.41 R34.2 DZ9.2@184.58,15.83
NetDZ12_2: DZ12.2 FPGA.2 R37.1 R38.2 | length 41
  Bottom Layer w0.7: R38.2 83.25,29.16 R37.1 95.708,26.25 102.46,19.498 FPGA.2@102.46,10.25
NetDZ13_2: DZ13.2 FPGA.4 R42.2 R43.2 | length 46.8
  Bottom Layer w0.7: DZ13.2 81.5,18.15 81.5,8 83.9,5.6 96.85,5.6 97.38,6.13 97.38,11.79 R42.2 ; DZ13.2@78.16,21.65 R43.2 R43.2@78.16,26.75
NetFPGA_3: FPGA.3 J5.2 | length 31.9
  Bottom Layer w0.7: J5.2@75.5,8.25 75.5,6.57 77.87,4.2 97.79,4.2 99.92,6.33 FPGA.3@99.92,10.25
NetFPGA_8: FPGA.8 R41.2 | length 20.9
  Top Layer w0.7: v1(75.5,10.75) 75.75,10.5 v1(84,10.5)
  Bottom Layer w0.7: R41.2 70.5,13.5 73.5,10.5 v1@76,10.5 ; v1(84,10.5) FPGA.8
NetIO_1: IO.1 R44.1 | length 5.4
  Bottom Layer w0.7: IO.1 107.25,95.25 R44.1
NetIO_2: IO.2 PUENTE_FR.2 | length 66
  Top Layer w0.7: v1(97.25,97.25) 97.25,97 95.5,95.25 95.5,86.928 95.52,86.948 95.52,70.692 96.662,69.55 98.808,69.55 107.19,61.168 107.19,56.692 108,55.882 v1(108,47.75)
  Bottom Layer w0.7: v1(97.25,97.25) 99.75,97.25 IO.2 ; PUENTE_FR.2 v1(108,47.75)
NetOUT_LATCHED_1: OUT_LATCHED.1 S1.1 U2.2 | length 49.2
  Bottom Layer w0.7: U2.2 10.958,28.79 12.69,27.058 12.69,21.418 14.09,20.018 14.09,11.838 15.49,10.438 15.49,6.97 17.41,5.05 24.05,5.05 25.05,6.05 25.05,19.95 S1.1@24.75,20.25
NetOUT_LATCHED_2: OUT_LATCHED.2 S1.2 U2.5 | length 47
  Bottom Layer w0.7: U2.5 10.81,20.9 10.81,20.58 11.548,20.58 12.69,19.438 12.69,11.258 14.09,9.858 14.09,4.82 15.26,3.65 25.4,3.65 27.45,5.7 S1.2@27.45,19.75
NetOUT_LATCHED_3: OUT_LATCHED.3 S1.3 U2.6 | length 50.8
  Top Layer w0.7: v1(7,19) 7,8.5 9.75,5.75 18.75,5.75 20.7,7.7 20.7,11.95 21.75,13 21.851,13 21.901,13.05 23.599,13.05 23.649,13 v1(30,13)
  Bottom Layer w0.7: v1@6.88,18.63 U2.6 ; S1.3@29.99,19.75 29.99,16.14 OUT_LATCHED.3@30,16.13 ; v1(30,13) OUT_LATCHED.3@30,16.13 ; OUT_LATCHED.3 OUT_LATCHED.3@30,16.13
NetOUT_LATCHED_4: OUT_LATCHED.4 S1.4 U2.9 | length 43.6
  Bottom Layer w0.7: U2.9 11.13,10.42 11.548,10.42 12.69,9.278 12.69,4.24 14.68,2.25 27.75,2.25 32.53,7.03 32.53,17.5 32.53,19.72 S1.4@32.25,20
NetOUT_LATCHED_5: OUT_LATCHED.5 S1.5 U2.12 | length 26.1
  Top Layer w0.7: v1(22.75,11) 22.8,10.95 35.41,10.95 v1@35.46,11 ; v1(35,11.25) v1@35.21,11.25
  Bottom Layer w0.7: U2.12 v1@22.5,11.01 ; v1(35,11.25) 35.07,11.32 S1.5@35.07,20
NetOUT_LATCHED_6: OUT_LATCHED.6 S1.6 U2.15 | length 25.6
  Bottom Layer w0.7: U2.15 19.84,18.63 23.06,21.85 35.9,21.85 37.45,20.3 S1.6@37.45,19.75 ; S1.6@37.61,19.75 37.61,16.14 OUT_LATCHED.6
NetOUT_LATCHED_7: OUT_LATCHED.7 S1.7 U2.16 | length 29
  Bottom Layer w0.7: U2.16 20.4,21.17 22.48,23.25 37,23.25 39.99,20.26 S1.7@39.99,19.75 ; S1.7@40.14,19 S1.7@40.14,19.75 ; S1.7@40.15,19.75 40.15,16.14 OUT_LATCHED.7
NetOUT_LATCHED_8: OUT_LATCHED.8 S1.8 U2.19 | length 33.7
  Bottom Layer w0.7: U2.19 18.42,29.05 21.599,29.05 22.8,27.849 22.8,26.101 22.75,26.051 22.75,25.9 24,24.65 38.048,24.65 42.83,19.868 OUT_LATCHED.8
NetPUENTE_FAA_1: PTE_FAA.1 U6.5 | length 13.7
  Bottom Layer w0.7: PTE_FAA.1 75.71,59.49 77,58.2 U6.5
NetPUENTE_FR_3: PUENTE_FR.3 U5.5 | length 18.5
  Bottom Layer w0.7: U5.5 92.5,35.738 94.362,37.6 102.28,37.6 103.55,38.87 103.55,41.91 PUENTE_FR.3
NetR1_1: R1.1 R15.2 U8.6 | length 16.5
  Bottom Layer w0.7: R15.2 111.5,57.5 R1.1 114.25,60.25 114.25,67.32 112.98,68.59 U8.6
NetR2_2: R2.2 R3.1 | length 6.3
  Bottom Layer w0.7: R3.1@156.75,30.25 R3.1 159.25,33 R2.2
NetR12_2: R12.2 R13.1 | length 2.8
  Bottom Layer w0.7: R13.1 162.91,10.16 R12.2
NetR14_1: R14.1 R16.1 U8.3 | length 39.2
  Bottom Layer w0.7: R16.1@108,85.32 108.18,85.5 R14.1 115.44,84.91 117,83.35 120.15,83.35 127.5,76 127.5,69.5 126.59,68.59 U8.3
NetR15_1: R15.1 U8.1 U8.2 | length 8.7
  Bottom Layer w0.7: U8.2 U8.1 119.5,63.07 R15.1
NetR17_1: R17.1 T1.1 | length 12.1
  Bottom Layer w0.7: R17.1 91.43,19 93,19 94.75,17.25 T1.1
NetR19_1: R19.1 S3..16 | length 14
  Bottom Layer w0.7: S3..16 195.5,79.25 197.5,77.25 R19.1
NetR20_1: R20.1 S3..15 | length 15.9
  Bottom Layer w0.7: S3..15 192.96,77.79 194.75,76 R20.1
NetR21_1: R21.1 S3..14 | length 19.3
  Bottom Layer w0.7: S3..14 190.42,76.08 191.92,74.58 R21.1
NetR22_1: R22.1 S3..13 | length 21.2
  Bottom Layer w0.7: S3..13 187.88,76.37 189.17,75.08 R22.1
NetR23_1: R23.1 S3..12 | length 3.3
  Bottom Layer w0.7: R23.1 S3..12@185.25,82.79
NetR24_1: R24.1 S3..11 | length 3.5
  Bottom Layer w0.7: R24.1 182.5,82.58 S3..11
NetR25_1: R25.1 S3..10 | length 3.8
  Bottom Layer w0.7: R25.1 179.75,82.37 S3..10
NetR26_1: R26.1 S3..9 | length 4
  Bottom Layer w0.7: R26.1 176.75,81.91 S3..9
NetR40_1: R40.1 SCHMITT.2 | length 4
  Bottom Layer w0.7: SCHMITT.2 128.76,46 131.05,46 R40.1@131.5,45.55
NetR44_2: R44.2 R45.1 U8.5 | length 18.5
  Bottom Layer w0.7: R44.2 R45.1 114.609,77.32 116.01,75.919 116.01,72.83 114.31,71.13 U8.5
NetR46_1: R46.1 T2.1 | length 5.3
  Bottom Layer w0.7: T2.1 72.77,50.98 R46.1
NetR47_2: R47.2 T2.2 U5.1 U6.1 | length 85.5
  Bottom Layer w0.7: T2.2@70.26,53.49 64.45,59.3 64.45,63.91 66.36,65.82 U6.1 ; T2.2 73.23,53.52 77.5,49.25 88.75,49.25 90.25,47.75 90.25,41.23 91.08,40.4 97.998,40.4 100.12,42.522 U5.1 100.12,44.37 105.5,49.75 111.82,49.75 114.5,47.07 R47.2
NetU5_3: U5.3 U5.4 | length 2.5
  Bottom Layer w0.7: U5.4 U5.3
NetU6_3: U6.3 U6.4 | length 2.5
  Bottom Layer w0.7: U6.4 U6.3
OE_ADC: ADC.9 OE.1 R9.2 | length 15.9
  Bottom Layer w0.7: OE.1 61.55,97.5 61.55,87.95 63.5,86 R9.2
OUT_COMP: COMP.7 R6.1 R40.2 R42.1 | length 64.8
  Top Layer w0.7: v1(118.75,39.5) 118.75,42 120.45,43.7 132.758,43.7 133.208,43.25 v1(139.25,43.25)
  Bottom Layer w0.7: R42.1 118.741,22.991 118.741,39.741 v1@119,40 ; v1(139.25,43.25) 141.66,45.66 R40.2 ; R6.1@141.75,49.3 141.75,45.64 141.66,45.55 143.628,45.55 143.79,45.388 143.79,45.262 144.932,44.12 COMP.7@145.25,44.12
SH_CONTROL: FPGA.5 S/H.8 | length 130.3
  Top Layer w0.7: v1(94.75,1.75) v1@94.75,7.66
  Bottom Layer w0.7: S/H.8 82.91,81.66 80.93,81.66 70.27,71 65.25,71 61.65,67.4 61.65,47.1 65.77,42.98 65.77,10.73 74.75,1.75 v1(94.75,1.75) ; v1@94.75,7 94.84,7.09 v1(94.84,7.75) FPGA.5@94.84,10.25
SH_IN: PTE_FAA.2 S/H.3 | length 28.9
  Top Layer w0.7: v1(84,76.75) 84.25,77 v1(89.5,77)
  Bottom Layer w0.7: PTE_FAA.2 78.25,73 82,76.75 v1(84,76.75) ; v1(89.5,77) 89.5,79.381 89.49,79.391 89.49,86.118 91.552,88.18 91.97,88.18 S/H.3
SH_OUT: ADC.26 R39.1 S/H.5 | length 75.6
  Bottom Layer w0.7: ADC.26@10.54,46.12 ADC.26 ; S/H.5 84.94,95.69 86.5,97.25 93.25,97.25 102.85,87.65 124.1,87.65 130.4,81.35 130.4,68.1 R39.1
START/EOC: ADC.6 ADC.7 ADC.22 S_START.1 U2.11 | length 93.4
  Top Layer w0.7: v1(23,8) 35.061,8 34.96,8.101 v1(34.96,8.25) ; v1(30.75,50.25) 30.75,34.75 32,33.5 46.5,33.5 49,31 v1(49,28)
  Bottom Layer w0.7: U2.11@18.19,8.5 U2.11 18.63,8 v1(23,8) ; ADC.7@25.95,56.87 ADC.7 ADC.6 27.01,53.74 30.5,50.25 v1@30.5,49.75 ; v1(34.96,8.25) 39.21,8.25 49,18.04 v1(49,28)
VCC_3.3: C18.1 J5.3 R6.2 R17.2 R41.3 R46.2 S3..1 S3..2 S3..3 S3..4 S3..5 S3..6 S3..7 S3..8 U4.3 | length 197.7
  Top Layer w0.7: v1(76,43) 77.75,44.75 88,44.75 94.56,51.31 97.849,51.31 98.289,51.75 98.789,51.25 v1(100.75,51.25)
  Bottom Layer w0.7: R46.2@72.96,40.86 72.96,15.9 R41.3 R17.2 78.04,15.77 J5.3@78.04,8.25 ; R46.2 73.34,40.59 v1@75.75,43 ; v1(100.75,51.25) 101.6,52.1 102.519,52.1 103.169,52.75 115.601,52.75 116.901,51.45 118.599,51.45 119.249,52.1 123.35,52.1 127.75,56.5 139.34,56.5 R6.2 148.7,59.41 153.04,63.75 166.25,63.75 170.5,68 170.5,73.61 166.7,77.41 U4.3 ; C18.1 172,90.5 S3..8 S3..7 S3..6 S3..5 S3..4 S3..3 S3..2 S3..1 ; U4.3@167.25,78.04 C18.1@167.25,85.5
VCC_5: ADC.11 ADC.12 C14.1 C16.1 C17.2 C24.1 C25.2 C26.1 D11.2 D12.2 D13.2 DZ10.2 FPGA_ALIM.1 OE.2 R18.2 R35.2 R47.1 S_START.3 U1.20 U2.20 U3.3 U5.7 U6.7 | length 209.4
  Top Layer w0.7: v1(114.5,27.25) 115,27.25 116.7,28.95 116.7,46.95 117.75,48 v1(117.75,53.5)
  Bottom Layer w0.7: C26.1 7.29,87.87 U1.20 ; U2.20 18.16,38.45 23.8,44.09 23.8,64.708 24.942,65.85 25.36,65.85 ADC.11 ADC.12 C24.1@29.73,68.98 ; OE.2@63.66,97.75 64,97.75 OE.2 ; U6.7 C16.1@81.25,63.28 ; C16.1 83.79,65.9 D13.2 DZ10.2 94.42,65.9 R35.2 99.5,60.98 D11.2@99.5,55.99 ; U5.7 97.96,34.94 97.96,32.86 99.75,31.07 C17.2 ; D11.2@99.25,55.74 D11.2@99.5,55.99 ; R18.2@100.66,28.5 100.66,30.95 C17.2 ; v1(114.5,27.25) R47.1 114.42,30.49 D12.2 110.42,30.57 108,30.57 107.45,31.12 107.45,32.58 106.25,33.78 103.25,33.78 C17.2 ; C14.1@153.54,72.83 U3.3 ; C14.1 153.71,67.21 148.06,61.56 141.442,61.56 138.382,58.5 127.77,58.5 122.77,53.5 v1(117.75,53.5) 117.25,54 116.331,54 116.181,54.15 102.589,54.15 101.939,53.5 101.25,53.5 99.5,55.25 D11.2 D11.2@99.5,55.99
VCC_10: ALIMENTACION.3 C1.1 C3.2 C5.1 C7.1 C9.1 C11.2 C13.1 C15.1 COMP.8 DAC1.13 DAC2.13 R4.2 R10.1 S/H.4 TRANS.8 U3.1 U4.1 U8.8 | length 251
  Top Layer w0.7: v1(122,75) 122,71.25 127.95,65.3 129.349,65.3 130.55,64.099 130.55,62.401 128.149,60 v1(123.75,60) ; v1(148.5,52.5) 148.54,52.54 v1(148.54,66.29)
  Bottom Layer w0.7: C7.1 92.54,91.33 S/H.4 96.44,91.31 104.4,83.35 109.552,83.35 109.942,83.74 113.51,83.74 122,75.25 v1(122,75) ; U8.8@111.42,63.53 C9.1 106.25,61.78 106.25,57.25 107.95,55.55 120.508,55.55 121.65,56.692 121.65,57.65 124.1,60.1 138.002,60.1 144.192,66.29 v1(148.54,66.29) C13.1 ; DAC1.13 139.45,27.76 139.46,27.77 139.46,28.19 142.75,31.48 R4.2 146,36.09 148.42,36.09 C1.1 ; ALIMENTACION.3 150.25,86 159.42,86 162.21,83.21 U4.1 ; COMP.8 148.45,40.99 ; v1@148.25,53.1 148.46,52.89 C1.1 ; U3.1@148.605,77.855 148.5,77.75 148.5,72.79 148.46,72.83 U3.1 148.46,79.71 150,81.25 158.96,81.25 U4.1 ; TRANS.8 148.69,35.82 C1.1 ; C15.1@162.21,71.5 U4.1
VEE_5: C19.1 C20.1 C23.1 D14.1 DZ11.1 R14.2 R14.3 R36.2 U5.2 U6.2 U7.3 | length 143.6
  Top Layer w0.7: v1(97.58,45.75) 99.25,45.75 99.5,46 110.25,46 115.7,51.45 115.7,54.349 116.901,55.55 118.599,55.55 120.508,55.55 121.65,56.692 121.65,62.15 122.75,63.25 v1(128.5,63.25)
  Bottom Layer w0.7: C20.1 72.04,63.21 74,61.25 74,54.75 77.1,51.65 85.5,51.65 85.58,51.57 89,51.57 89.08,51.65 93.63,51.65 C19.1 97.58,47.7 v1(97.58,45.75) U5.2 ; R14.2 122.5,85.5 129,79 129,62.75 130.25,61.5 135,61.5 139.54,66.04 C23.1 U7.3
VEE_10: ALIMENTACION.1 C2.2 C4.1 C6.1 C10.2 C12.2 C21.1 C22.2 DAC1.3 DAC2.3 S/H.1 U7.2 U8.4 | length 158
  Top Layer w0.7: v1(98.5,79.5) 98.56,79.44 113.19,79.44 v1(113.25,79.5) v1@112.618,79.5 ; v1(125,71.25) 127.25,71.25 130.5,68 v1(137,68) v1(137,52)
  Bottom Layer w0.7: S/H.1 92.56,81.27 C6.1 93.75,80.25 94.5,79.5 v1(98.5,79.5) ; v1(113.25,79.5) 114.61,79.5 C21.1 ; C21.1@119.06,75.05 U8.4 124.88,71.13 v1(125,71.25) ; C2.2 125.29,30.3 DAC1.3 130,30.3 131.71,32.01 C4.1 128.95,39.05 128.5,39.5 128.5,43.25 129.3,44.05 133.05,44.05 137,48 v1(137,52) v1@137,52.5 ; U7.2@136.75,78.25 C22.2 137,86.25 137,93.75 139.75,96.5 152,96.5 155,93.5 ALIMENTACION.1 ; v1(137,68) U7.2
pads on no net: COMP.5 COMP.6 FPGA.1 S/H.2 S_START.2 S_START.4

## Text inside footprints (layer, text, board x,y; h text height)
C18: Top Overlay "+" at 167.448,84.332 h1.02 r180
C22: Top Overlay "+" at 134.302,87.168 h1.02